# Allegro board VIBRATION_SENSOR_FINAL.brd
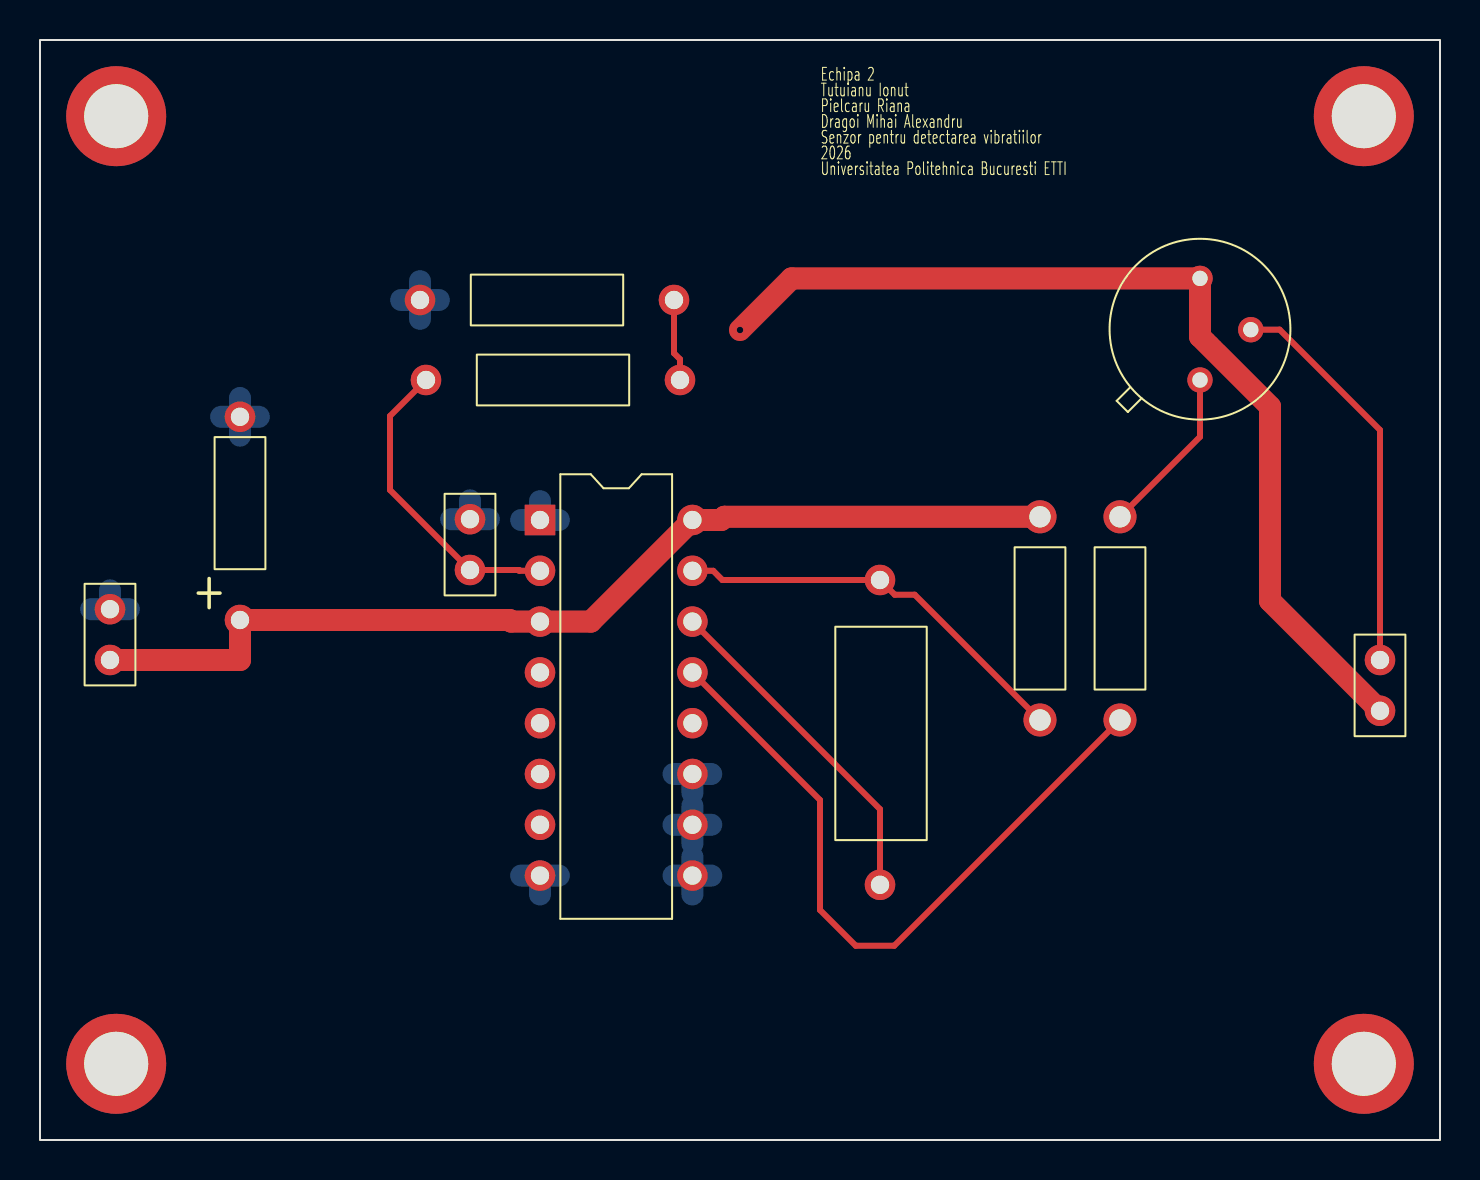
[diagram p0: board, top side]
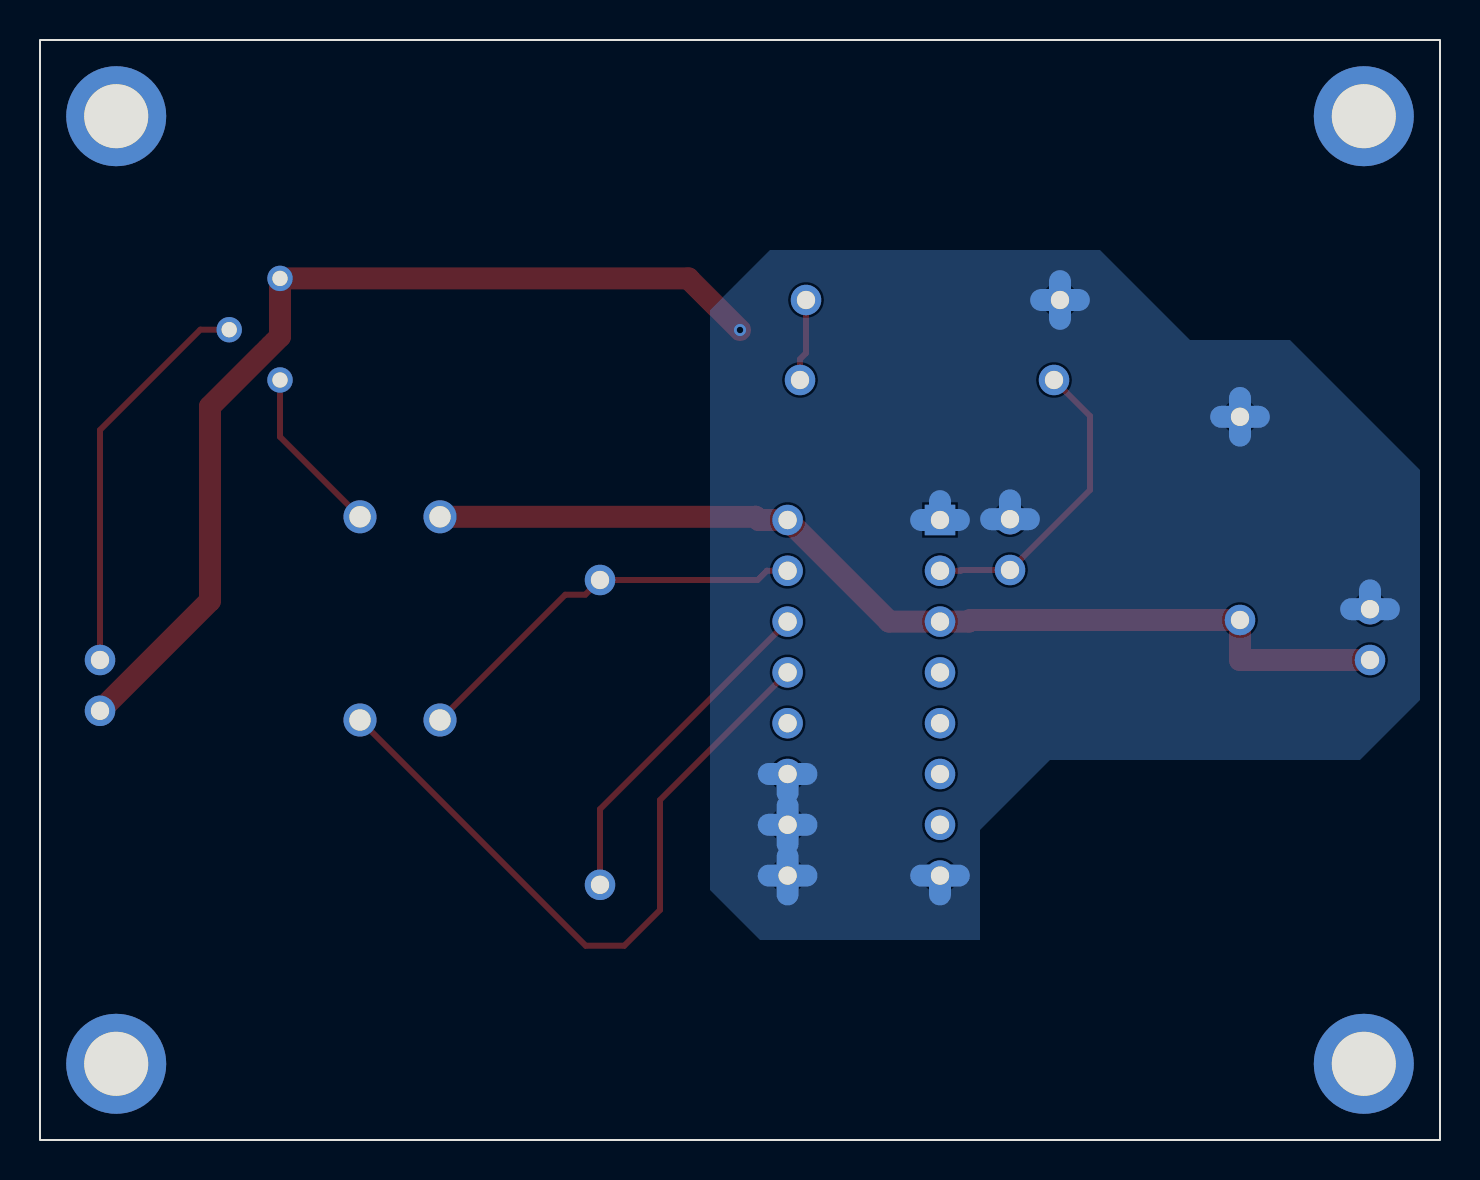
[diagram p1: board, bottom side, seen from below]

Outline 70 x 55 mm; copper layers: TOP, BOTTOM. Coordinates in mm from the lower left corner of the outline.
Outline path: rectangle 0,0 70,55

## Placement (name value [footprint] x y rotation side)
BT1  3V  [JUMPER2]  3.5 24 90 top
C1  100nF  [CAP400]  10 26 0 top
C2  47uF  [CAP600]  42 28 180 top
IC1  M74HC123  [DIP16_3]  25 31 0 top
J1  CON2  [JUMPER2]  67 24 270 top
NOREF  -  [unnamed]  3.81 3.81 0 top
NOREF#2  -  [unnamed]  66.19 51.19 0 top
NOREF#3  -  [unnamed]  3.81 51.19 0 top
NOREF#4  -  [unnamed]  66.19 3.81 0 top
Q1  PIEZO_SENSOR  [JUMPER2]  21.5 28.5 90 top
R1  4M7  [RES500]  32 38 270 top
R2  4M7  [RES500]  19 42 90 top
R3  100K  [RES400]  50 21 0 top
R4  10K  [RES400]  54 21 0 top
T1  BC547  [TO5]  58 38 0 top

## Library data of the parts
BT1 = BATTERY_1: User Part Number: ***
C1 = CAP NP: Tolerance: ***; User Part Number: ***
C2 = CAP POL: Tolerance: ***; User Part Number: ***
IC1 = M74HC123_3: Tolerance: ***; User Part Number: ***
J1 = CON2: User Part Number: ***
Q1 = PIEZO_SENSOR_2: User Part Number: ***
R1-R4 = R: Tolerance: ***; User Part Number: ***
T1 = NPN BCE_0

## Footprints (pads in the part's own frame, mm; a bottom-side part is the same pattern mirrored in y, then rotated)
CAP400
  round 1.524 hole 0.914: 1(0,0) 2(0,10.16)
CAP600
  round 1.524 hole 0.914: 1(0,0) 2(0,15.24)
DIP16_3
  rect 1.524x1.524 hole 0.914: 1(0,0)
  round 1.524 hole 0.914: 2(0,-2.54) 3(0,-5.08) 4(0,-7.62) 5(0,-10.16) 6(0,-12.7) 7(0,-15.24) 8(0,-17.78) 9(7.62,-17.78) 10(7.62,-15.24) 11(7.62,-12.7) 12(7.62,-10.16) 13(7.62,-7.62) 14(7.62,-5.08) 15(7.62,-2.54) 16(7.62,0)
JUMPER2
  round 1.524 hole 0.914: 1(0,0) 2(2.54,0)
RES400
  round 1.651 hole 1.067: 1(0,0) 2(0,10.16)
RES500
  round 1.524 hole 0.914: 1(0,-12.7) 2(0,0)
TO5
  round 1.27 hole 0.762: 1(0,0) 2(2.54,2.515) 3(0,5.08)
unnamed
  round 5 hole 3.2 unplated: (0,0)

## Nets
GND: BT1.2(-) C1.2 IC1.1 IC1.8 IC1.9 IC1.10 IC1.11 J1.2 Q1.2 R2.2 T1.3(E)
N00546: C2.1 IC1.15 R3.1
N00550: C2.2 IC1.14
N00559: BT1.1(+) C1.1 IC1.3(CLR) IC1.16(3V) R3.2
N00589: IC1.13(OUT) R4.1
N00593: R4.2 T1.1(B)
N00597: J1.1 T1.2(C)
N00616: R1.2 R2.1
N00664: IC1.2(PIEZO_IN) Q1.1 R1.1

Pads without a net: IC1 4 5 6 7 12

## Via types
v1: diameter 0.61, hole 0.33, TOP to BOTTOM, 1 via

## Routing (per net, layer and track width the routed paths; a pad name or vN(x,y) marks a point on that pad's centre or on a via; arc(x,y) is an arc through that point)
GND: length 78.6
  TOP w1.1: v1(35,40.5) 37.58,43.08 T1.3 58,40.17 61.5,36.67 61.5,26.96 J1.2
  BOTTOM w1.1: 19,41.06 R2.2 ; R2.2 19,42.94 ; R2.2 18.06,42 ; R2.2 19.94,42 ; 25,12.28 IC1.8 ; IC1.8 24.06,13.22 ; IC1.8 25.94,13.22 ; 24.06,31 IC1.1 ; IC1.1 25,31.94 ; IC1.1 25.94,31 ; BT1.2 3.5,27.48 ; BT1.2 2.56,26.54 ; BT1.2 4.44,26.54 ; 9.06,36.16 C1.2 ; C1.2 10,35.22 ; C1.2 10,37.1 ; C1.2 10.94,36.16 ; IC1.11 33.56,18.3 ; IC1.11 31.68,18.3 ; IC1.11 32.62,17.36 ; IC1.9 32.62,14.16 ; IC1.9 32.62,12.28 ; IC1.9 31.68,13.22 ; IC1.9 33.56,13.22 ; 31.68,15.76 IC1.10 ; IC1.10 33.56,15.76 ; IC1.10 32.62,16.7 ; IC1.10 32.62,14.82 ; Q1.2 21.5,31.98 ; Q1.2 20.56,31.04 ; Q1.2 22.44,31.04
N00546: length 20.5
  TOP w0.3: IC1.15 33.66,28.46 34.12,28 C2.1 42.74,27.26 43.74,27.26 R3.1
N00550: length 17
  TOP w0.3: IC1.14 42,16.54 C2.2
N00559: length 50.7
  TOP w1.1: R3.2 34.22,31.16 34.06,31 IC1.16 27.54,25.92 IC1.3 23.56,25.92 23.48,26 C1.1 10,24 BT1.1
N00589: length 34.9
  TOP w0.3: IC1.13 39,17 39,11.5 40.79,9.71 42.71,9.71 R4.1
N00593: length 8.5
  TOP w0.3: R4.2 58,35.16 T1.1
N00597: length 20
  TOP w0.3: T1.2 61.98,40.52 67,35.5 J1.1
N00616: length 4.1
  TOP w0.3: R2.1 31.7,39.34 32,39.04 R1.2
N00664: length 15.4
  TOP w0.3: IC1.2 23.96,28.46 23.96,28.5 Q1.1 17.5,32.5 17.5,36.2 R1.1

## Copper pours and planes (outline as drawn; the poured copper is in the pictures)
GND on BOTTOM: 33.5,44.5 17,44.5 12.5,40 7.5,40 1,33.5 1,22 4,19 19.5,19 23,15.5 23,10 34,10 36.5,12.5 36.5,41.5

## Text on the board
Ref Des/Silkscreen Top: Echipa 2 | Tutuianu Ionut | Pielcaru Riana | Dragoi Mihai Alexandru | Senzor pentru detectarea vibratiilor | 2026 | Universitatea Politehnica Bucuresti ETTI
